# Altium PCB PCB_PicoAdapterGB_AGB.pcbdoc
Units mm, origin at the board's own origin, x right, y up, seen from the top; angles counter-clockwise.
Board outline 47.12 x 144.94 mm, 2 copper layers (Top Layer, Bottom Layer); 6 components, 16 nets, 72 pads, 0 vias.
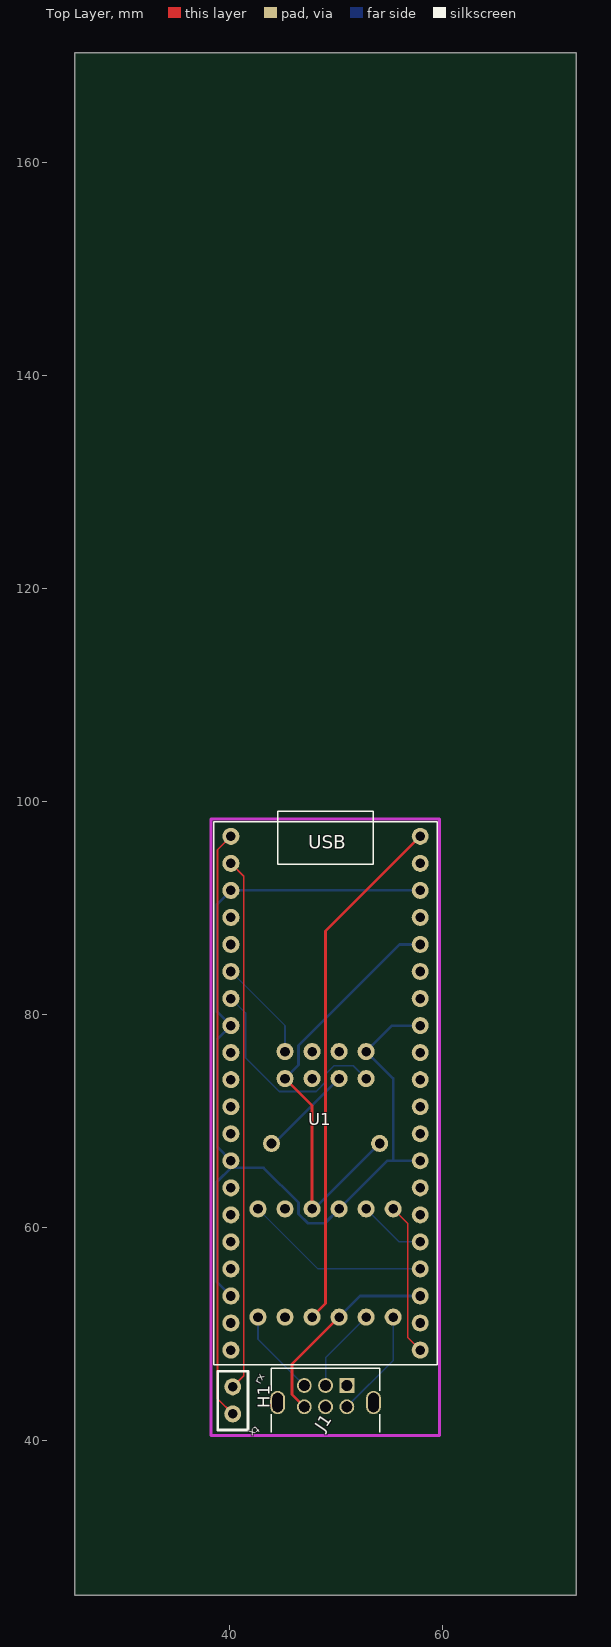
[diagram p0: Top Layer view]
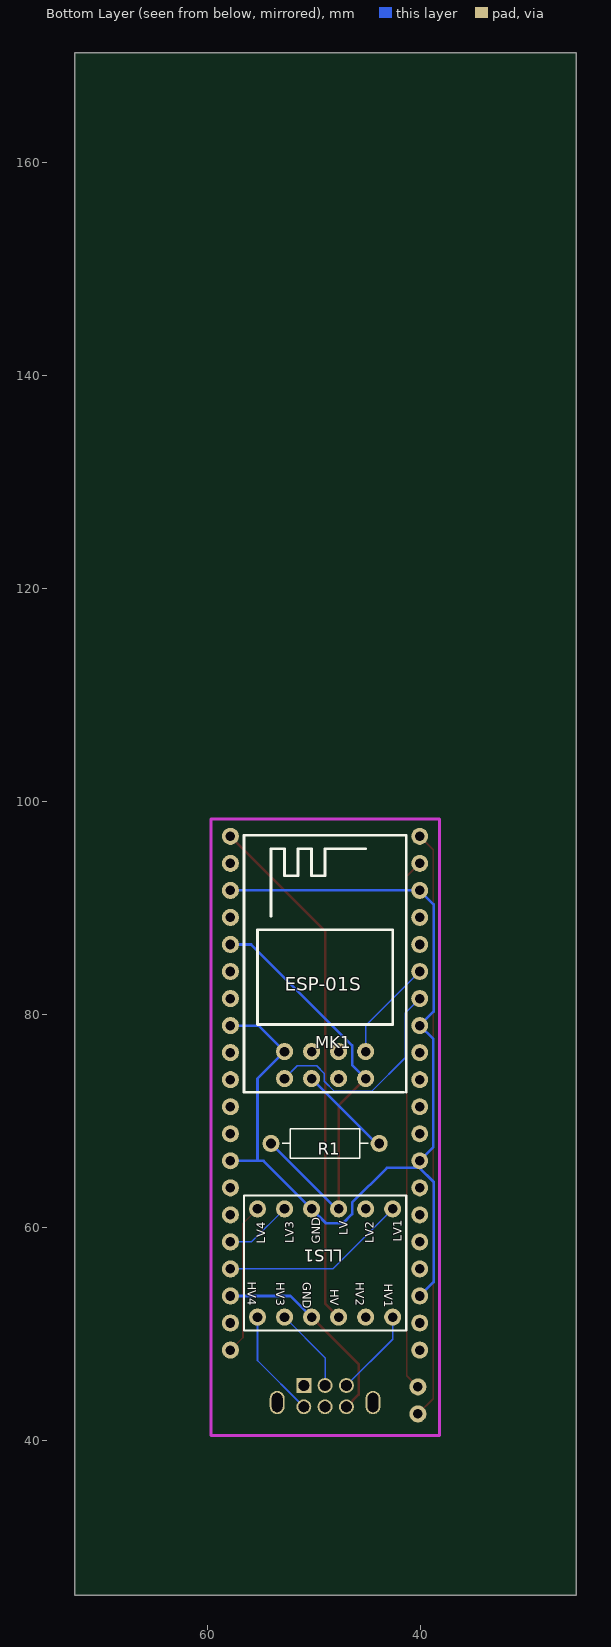
[diagram p1: Bottom Layer view, seen from below]

## Layer stack, top to bottom
Top Layer: signal copper (thickness not stored)
Dielectric: dielectric 0.32, FR-4, Dk 4.8
Bottom Layer: signal copper (thickness not stored)

## Board outline
72.517,25.4 25.4,25.4 25.4,170.342 72.517,170.342

## Components (designator, comment, footprint, x,y, rotation, side; value= is the part's Value field where it differs from the comment)
H1 "1x2_Male_Pin_Header" 1X2/2.54_MALE_PIN_HEADER 38.989,43.728 r90 top
J1 "GameBoy_LinkPort" GAMEBOY_LINKPORT_MGB_HORIZONTAL 50.981,45.125 r270 top
LLS1 "Logical_Level_Shifter_Bidirectional" "LOGIC_LEVEL BIDIRECTIONAL" 41.371,63.032 r90 bottom
MK1 "ESP-01S_C82893" WIRELM-TH_ESP-01S 48.981,75.224 r0 bottom
R1 "10k Resistor" R_AXIAL_DIN0207_L6.3MM_D2.5MM_P10.16MM_HORIZONTAL 47.711,69.128 r90 bottom
U1 "Raspberry Pi Pico" FT_RASPBERRY-PI-PICO_TH 48.641,72.684 r0 top

## Footprints (in the part's own frame and the unit in brackets; to place one, negate y for a bottom-side part, rotate by r counter-clockwise, add the part's x,y. Pads: shape width x height; smd on the part's side, far side on the other; paste and mask are expansions set on the pad)
1X2/2.54_MALE_PIN_HEADER [mm]
  round 1.6 hole 0.9: 1(-1.27,-1.27) 2(1.27,-1.27)
  silkscreen extent -2.78,-2.7 2.72,0.14
FT_RASPBERRY-PI-PICO_TH [mm]
  round 1.6 hole 0.9: 1(-8.55,24.03) 2(-8.55,21.49) 3(-8.55,18.95) 4(-8.55,16.41) 5(-8.55,13.87) 6(-8.55,11.33) 7(-8.55,8.79) 8(-8.55,6.25) 9(-8.55,3.71) 10(-8.55,1.17) 11(-8.55,-1.37) 12(-8.55,-3.91) 13(-8.55,-6.45) 14(-8.55,-8.99) 15(-8.55,-11.53) 16(-8.55,-14.07) 17(-8.55,-16.61) 18(-8.55,-19.15) 19(-8.55,-21.69) 20(-8.55,-24.23) 21(9.23,-24.23) 22(9.23,-21.69) 23(9.23,-19.15) 24(9.23,-16.61) 25(9.23,-14.07) 26(9.23,-11.53) 27(9.23,-8.99) 28(9.23,-6.45) 29(9.23,-3.91) 30(9.23,-1.37) 31(9.23,1.17) 32(9.23,3.71) 33(9.23,6.25) 34(9.23,8.79) 35(9.23,11.33) 36(9.23,13.87) 37(9.23,16.41) 38(9.23,18.95) 39(9.23,21.49) 40(9.23,24.03)
  silkscreen extent -10.16,-25.6 10.84,26.4
GAMEBOY_LINKPORT_MGB_HORIZONTAL [mm]
  rect 1.4x1.4 hole 1: 1(0,0)
  round 1.4 hole 1: 2(2,0) 3(0,-2) 4(2,-2) 5(0,-4) 6(2,-4)
  oval 2.2x1.4 hole 1 slot 1.8 at 0 deg: SH(1.6,2.5) SH(1.6,-6.5)
  silkscreen extent -1.6,-7.1 4.4,3.1
"LOGIC_LEVEL BIDIRECTIONAL" [mm]
  round 1.6 hole 0.9: 1(-11.481,1.26) 2(-11.481,3.8) 3(-11.481,6.34) 4(-11.481,8.88) 5(-11.481,11.42) 6(-11.481,13.96) 7(-1.321,13.96) 8(-1.321,11.42) 9(-1.321,8.88) 10(-1.321,6.34) 11(-1.321,3.8) 12(-1.321,1.26)
  silkscreen extent -12.75,-0.01 -0.05,15.23
R_AXIAL_DIN0207_L6.3MM_D2.5MM_P10.16MM_HORIZONTAL [mm]
  round 1.6 hole 0.9: 1(-1.27,6.35) 2(-1.27,-3.81)
  silkscreen extent -2.64,-2.77 0.1,5.31
WIRELM-TH_ESP-01S [mm]
  round 1.6 hole 0.9: 1(3.81,-1.27) 2(1.27,-1.27) 3(-1.27,-1.27) 4(-3.81,-1.27) 5(-3.81,1.27) 6(-1.27,1.27) 7(1.27,1.27) 8(3.81,1.27)
  silkscreen extent -7.62,-21.59 7.62,2.54

## Nets (pads, with @x,y where several pads share a name; then routed paths per layer and width w, separated by ;. In a path a pad name is that pad's centre, name@x,y a point inside that pad or via, vN(x,y) a via of type N, cw(c..) or ccw(c..) an arc to the next point about the centre after c; other vN are vias at no path point)
3V3: LLS1.10 MK1.5 R1.1 U1.36 | length 41.2
  Top Layer w0.25: MK1.5 47.711,71.414 LLS1.10
  Bottom Layer w0.25: MK1.5 46.441,75.224 46.441,77.063 55.932,86.554 U1.36 ; LLS1.10 47.914,61.711 R1.1
5V: LLS1.3 U1.40 | length 49.4
  Top Layer w0.25: LLS1.3 48.981,52.821 48.981,87.824 U1.40
GBGND: J1.6 LLS1.4 U1.23 | length 19.2
  Top Layer w0.25: J1.6 45.822,44.284 45.822,47.122 LLS1.4
  Bottom Layer w0.25: LLS1.4 52.234,53.534 U1.23
GBSC: J1.5 LLS1.1 | length 8.2
  Bottom Layer w0.152: LLS1.1 42.631,49.475 J1.5
GBSI: J1.3 LLS1.5 | length 8
  Bottom Layer w0.152: J1.3 48.981,47.741 LLS1.5
GBSO: J1.2 LLS1.6 | length 10.2
  Bottom Layer w0.152: J1.2 55.331,47.475 LLS1.6
GND: LLS1.9 MK1.1 U1.3 U1.8 U1.13 U1.18 U1.28 U1.33 U1.38 | length 99.5
  Bottom Layer w0.25: U1.18 38.777,54.848 38.777,64.263 U1.13@40.091,65.577 ; U1.28 55.325,66.234 ; U1.33 55.231,78.934 MK1.1 55.325,73.96 55.325,66.234 ; U1.38 U1.3 38.777,90.32 38.777,80.248 U1.8 38.818,77.661 38.818,67.507 U1.13 U1.13@40.091,65.577 ; U1.13@40.091,65.577 43.164,65.577 46.441,62.3 46.441,61.239 47.316,60.364 48.904,60.364 LLS1.9 54.774,66.234 55.325,66.234
MK1_7: MK1.7 R1.2 | length 8.9
  Bottom Layer w0.25: R1.2 44.155,67.858 MK1.7
PROBERX: H1.2 U1.2 | length 50.1
  Top Layer w0.152: U1.2 41.305,92.96 41.305,46.044 H1.2
PROBETX: H1.1 U1.1 | length 55.4
  Top Layer w0.152: U1.1 38.828,95.451 38.828,43.889 H1.1
RXPIN: MK1.4 U1.6 | length 9.6
  Bottom Layer w0.152: U1.6 45.171,78.934 MK1.4
S$36638: 
SPICLK: LLS1.12 U1.24 | length 17.6
  Bottom Layer w0.152: LLS1.12 48.268,56.074 U1.24
SPISI: LLS1.8 U1.25 | length 6.4
  Bottom Layer w0.152: LLS1.8 55.888,58.614 U1.25
SPISO: LLS1.7 U1.21 | length 14.3
  Top Layer w0.152: LLS1.7 56.692,60.35 56.692,49.633 U1.21
TXPIN: MK1.8 U1.7 | length 20.7
  Bottom Layer w0.152: U1.7 41.454,80.111 41.454,75.912 44.619,72.747 48.094,72.747 49.056,73.71 49.056,74.432 49.776,75.151 51.593,75.151 MK1.8
pads on no net: J1.1 J1.4 J1.SH LLS1.2 LLS1.11 MK1.2 MK1.3 MK1.6 U1.4 U1.5 U1.9 U1.10 U1.11 U1.12 U1.14 U1.15 U1.16 U1.17 U1.19 U1.20 U1.22 U1.26 U1.27 U1.29 U1.30 U1.31 U1.32 U1.34 U1.35 U1.37 U1.39

## Silkscreen, mask and mechanical layers (free items; w line width, h text height)
Top Overlay:
  text "rx" at 42.851,45.209 h0.7 r61
  text "tx" at 42.457,41.337 h0.7 r218
Bottom Overlay:
  text "LV" at 46.844,59.222 h0.8 r270
  text "LV1" at 41.764,58.643 h0.8 r270
  text "LV2" at 44.431,58.479 h0.8 r270
  text "GND" at 49.422,58.46 h0.8 r270
  text "LV3" at 51.924,58.479 h0.8 r270
  text "LV4" at 54.591,58.46 h0.8 r270
  text "HV4" at 56.242,54.858 h0.8 r90
  text "HV2" at 46.082,54.841 h0.8 r90
  text "HV3" at 53.575,54.841 h0.8 r90
  text "GND" at 51.073,54.823 h0.8 r90
  text "HV1" at 43.415,54.677 h0.8 r90
  text "HV" at 48.495,54.142 h0.8 r90

## Text inside footprints (layer, text, board x,y; h text height)
J1: Document "REF" at 47.781,39.125 h1
MK1: Bottom Overlay "ESP-01S" at 52.791,82.209 h1.27
U1: Top Overlay "USB" at 47.371,95.544 h1.27